# EAGLE board pc_max30003_brk (EAGLE 6.4)
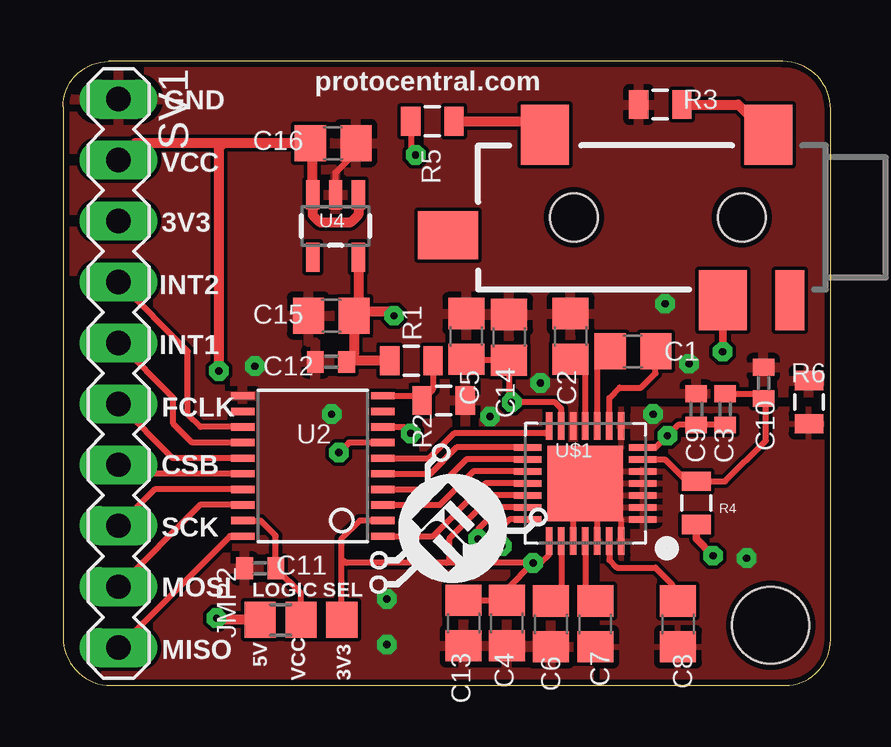
[diagram p0: board, top side]
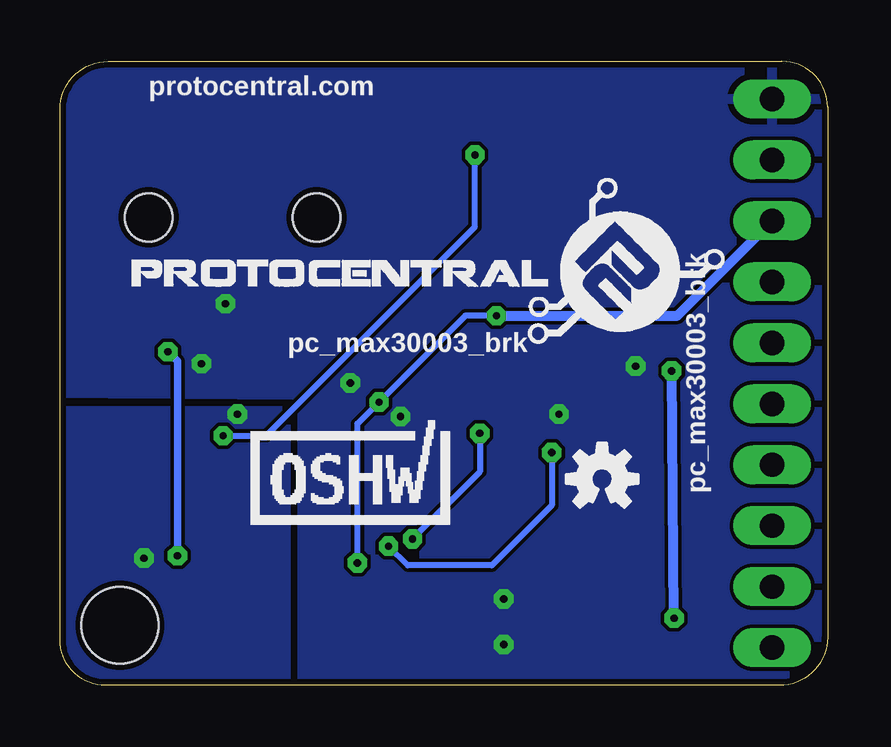
[diagram p1: board, bottom side, seen from below]

Size 32 x 26 mm. Coordinates in mm from the lower left corner, seen from the top.
Outline: 2,0 30.1,0 arc90 32,1.9 32,24 arc90 30,26 1.9,26 arc90 0,24.1 0,2 arc90 2,0
Copper layers (1*2*15*16): Top 0.035mm / dielectric 1.5mm / Route2 0.035mm / dielectric 0.15mm / Route15 0.035mm / dielectric 0.2mm / Bottom 0.035mm
Design rules "Circuitects-Rules": minimum track width 6mil, minimum drill 0.3mm, track to track 6mil, track to pad 6mil, pad to pad 6mil, via to via 6mil, smd to smd 6mil, copper to edge 10mil, drill to drill 8mil, minimum pad ring 12mil, minimum via ring 10mil, stop-mask expansion 4mil, vias tented up to drill 25mil, thermal gap 10mil
Holes 3.2 mm at 29.5,2.5

## Footprints (pad centres in the part's own frame; a part is rotated, then mirrored left to right if it is on the bottom)
C0805 = smd 1.3 x 1.5: 1 -0.95,0; 2 0.95,0
C0402 = smd 0.7 x 0.9: 1 -0.65,0; 2 0.65,0
A0R-JMP = smd 1.5 x 1.3: 1 0,1.7; 2 0,0; 3 0,-1.7
AUDIO-JACK-3.5MM-SMD = smd 2 x 2.5: RING 4.3,3.45; SLEEVE 2.4,-3.45; TIP 11.7,-3.45 | smd 1.2 x 2.5: RSH 1.5,3.45 | smd 2.5 x 2: TSH 15.75,0.75 | hole 2: 3.5,0; 10.5,0
0805 = smd 0.8 x 1.2: 1 -0.9,0; 2 0.9,0
MA10-1 = drill 1.016 long: 1 -11.43,0; 2 -8.89,0; 3 -6.35,0; 4 -3.81,0; 5 -1.27,0; 6 1.27,0; 7 3.81,0; 8 6.35,0; 9 8.89,0; 10 11.43,0
TSSOP20 = smd 0.305 x 0.991: 1 -2.925,-2.918; 2 -2.275,-2.918; 3 -1.625,-2.918; 4 -0.975,-2.918; 5 -0.325,-2.918; 6 0.325,-2.918; 7 0.975,-2.918; 8 1.625,-2.918; 9 2.275,-2.918; 10 2.925,-2.918; 11 2.925,2.918; 12 2.275,2.918; 13 1.625,2.918; 14 0.975,2.918; 15 0.325,2.918; 16 -0.325,2.918; 17 -0.975,2.918; 18 -1.625,2.918; 19 -2.275,2.918; 20 -2.925,2.918
SOT23-5 = smd 0.55 x 1.2: 1 -0.95,-1.3; 2 0,-1.3; 3 0.95,-1.3; 4 0.95,1.3; 5 -0.95,1.3
QFN-28 = smd 1.15 x 0.27: 1 -2.4,1.5; 2 -2.4,1; 3 -2.4,0.5; 4 -2.4,0; 5 -2.4,-0.5; 6 -2.4,-1; 7 -2.4,-1.5; 15 2.4,-1.5; 16 2.4,-1; 17 2.4,-0.5; 18 2.4,0; 19 2.4,0.5; 20 2.4,1; 21 2.4,1.5 | smd 0.27 x 1.15: 8 -1.5,-2.4; 9 -1,-2.4; 10 -0.5,-2.4; 11 0,-2.4; 12 0.5,-2.4; 13 1,-2.4; 14 1.5,-2.4; 22 1.5,2.4; 23 1,2.4; 24 0.5,2.4; 25 0,2.4; 26 -0.5,2.4; 27 -1,2.4; 28 -1.5,2.4 | smd 3.15 x 3.15: THERMAL 0,0

## Placement (x,y rotation side)
C1  1uF  [C0805]  23.76,13.91 180 top
C2  1nF  [C0805]  21.16,14.54 90 top
C3  1000pF  [C0402]  27.6,11.5 270 top
C4  10uF  [C0805]  18.5,2.6 270 top
C5  1uF  [C0805]  16.81,14.54 90 top
C6  10uF  [C0805]  20.34,2.56 270 top
C7  10uF  [C0805]  22.19,2.56 270 top
C8  1uF  [C0805]  25.64,2.56 270 top
C9  10pF  [C0402]  26.4,11.5 90 top
C10  10pF  [C0402]  29.2,12.6 90 top
C11  100n  [C0402]  8.22,4.88 0 top
C12  100n  [C0402]  11.17,13.48 0 top
C13  1uF  [C0805]  16.7,2.6 270 top
C14  10uF  [C0805]  18.6,14.5 90 top
C15  1u  [C0805]  11.18,15.4 0 top
C16  1u  [C0805]  11.26,22.59 180 top
JMP2  0R-JUMPA  [A0R-JMP]  9.92,2.73 90 top
JP3  [AUDIO-JACK-3.5MM-SMD]  31.8,19.5 180 top
R1  0R  [0805]  14.52,13.53 0 top
R2  10K  [0805]  15.87,11.87 180 top
R3  0R  [0805]  24.9,24.2 0 top
R4  49.9K  [0805]  26.4,7.6 90 top
R5  49.9K  [0805]  15.4,23.5 180 top
R6  0R  [0805]  31.1,11.8 270 top
SV1  [MA10-1]  2.31,13 270 top
U2  TXB0108PWR  [TSSOP20]  10.41,9.14 90 top
U4  AP2112K-3.3V  [SOT23-5]  11.36,19.14 180 top
U$1  MAX30003CTI+  [QFN-28]  21.77,8.41 180 top
U$2  PROTY_LOGO_WITH_TEXT  [PROTY_WITH_TEXT]  29,14.6 0 bottom
U$3  PROTY-LOGO  [LOGO-PROTY]  12.7,3.7 0 top
U$6  OSHW-LOGOS  [OSHW-LOGO-S]  9.4,8.6 0 bottom
U$7  [CERT-SMALL-SILK]  19.9,6.7 0 bottom

## Library data of the parts
C1-C16 = rcl
JMP2 = jump-0r-smd
JP3 = SparkFun-Connectors; PROD_ID: CONN-10353
R1-R6 U$6 = SparkFun
SV1 = con-lstb; OC_FARNELL: unknown; OC_NEWARK: unknown
U2 = adafruit
U4 = SparkFun-PowerIC; PROD_ID: VREG-12457
U$1-U$3 = circuitects
U$7 = OSHWA

## Nets
+3V3: C4.1 C5.1 C12.2 C13.1 C14.1 C15.2 JMP2.3 R1.1 SV1.3 U2.2 U4.5 U$1.13 U$1.19 U$1.22
AGND: C7.2 C8.2 R6.2 U$1.1 U$1.2 U$1.3 U$1.4 U$1.5 U$1.8 U$1.24 U$1.26 U$1.28 U$1.THERMAL
CSB: U2.5 U$1.15
CSB_OUT: SV1.7 U2.16
ECGN: C3.2 C9.1 R5.2 U$1.7
ECGP: C3.1 C10.1 R4.2 U$1.6
FCLK: U2.6 U$1.14
FCLK_OUT: SV1.6 U2.15
GND: C2.2 C4.2 C5.2 C6.2 C9.2 C10.2 C11.1 C12.1 C13.2 C14.2 C15.1 C16.1 R2.1 R3.1 R6.1 SV1.1 U2.11 U4.2 U$1.12
INT2B: U2.8 U$1.20
INT2B_OUT: SV1.4 U2.13
INTB: U2.7 U$1.21
INTB_OUT: SV1.5 U2.14
MISO: U2.1 U$1.18
MISO_OUT: SV1.10 U2.20
MOSI: U2.3 U$1.17
MOSI_OUT: SV1.9 U2.18
N$1: R1.2 R2.2 U2.10
N$2: C6.1 U$1.23
N$3: C1.1 U$1.9
N$4: JP3.SLEEVE R3.2
N$6: C1.2 U$1.10
N$7: C2.1 U$1.11
N$9: JP3.TIP R5.1
N$10: JP3.RING R4.1
N$13: C7.1 U$1.25
N$14: C8.1 U$1.27
SCLK: U2.4 U$1.16
SCLK_OUT: SV1.8 U2.17
VCC: C11.2 JMP2.2 U2.19
VDD: C16.2 JMP2.1 SV1.2 U4.1 U4.3

## Tracks (layer width: path | path; a pad name or v marks a point on that pad's centre or on a via)
+3V3  (via drill 0.3)
  Top 0.254: U$1.19 17.91,7.91 16.1,6.1 16.1,5.2 16,5.1 | U$1.13 20.77,11.53 20.5,11.8 v18.7,11.8 18.6,11.9 C14.1 16.85,13.55 C5.1 | U$1.22 20.27,5.47 19.9,5.1 v19.6,5.1 | v19.6,5.1 18.5,4 C4.1 C13.1 | U2.2 12.37,6.87 11.6,6.1 11.6,5.3 | 11.6,5.3 11.6,2.75 JMP2.3 | v19.6,5.1 16,5.1 | 16,5.1 11.8,5.1 11.6,5.3
  Top 0.406: R1.1 11.87,13.53 C12.2 12.13,13.79 C15.2 12.31,15.58 | 12.31,15.58 13.62,15.58 v13.8,15.4 | U4.5 12.31,15.58
  Bottom 0.254: v19.6,5.1 19.6,10.9 v18.7,11.8 15.1,15.4 v13.8,15.4
  Bottom 0.406: v13.8,15.4 6.26,15.4 SV1.3
AGND  (via drill 0.3)
  Top 0.254: U$1.24 21.27,7.91 U$1.THERMAL 22.27,7.91 | U$1.26 22.27,7.91 | U$1.28 23.27,6.91 22.27,7.91
  other vias: 28.5,5.3 24.6,11.3
  pour Bottom: 22.5,11.5 32.6,11.5 32.6,-0.1 22.5,-0.1
  pour Top: 22.5,11.5 32.6,11.5 32.6,-0.1 22.5,-0.1
CSB
  Top 0.254: U$1.15 16.41,9.91 15.31,8.81 U2.5
CSB_OUT
  Top 0.254: U2.16 2.69,8.81 SV1.7
ECGN  (via drill 0.3)
  Top 0.254: C3.2 C9.1 25.65,10.85 v25.2,10.4 24.71,9.91 U$1.7 | R5.2 14.5,22.3 v14.7,22.1
  Bottom 0.254: v25.2,10.4 23.4,10.4 14.7,19.1 v14.7,22.1
ECGP
  Top 0.254: U$1.6 25.09,9.41 26,8.5 R4.2 27.6,8.5 29.3,10.2 29.3,11.85 C10.1 29,12.15 C3.1
FCLK
  Top 0.254: U2.6 15.27,9.46 16.3,10.5 20.1,10.5 20.27,10.67 U$1.14
FCLK_OUT
  Top 0.254: U2.15 4.58,9.46 SV1.6
GND  (via drill 0.3)
  Top 0.254: U4.2 11.36,21.36 12.21,22.21 C16.1
  other vias: 8,13.3 13.5,1.7 13.5,3.6 11.2,11.3 25.1,15.9 26.1,13.4 19.9,12.6 17.8,11.2
  pour Top: 0,26.2 32.7,26.2 32.7,12.2 21.9,12.1 21.9,0 0,0.2
  pour Bottom: -0.1,26.2 32.7,26.2 32.7,12.2 21.9,12.1 21.9,0.1 -0.1,0.3
INT2B  (via drill 0.3)
  Top 0.254: U$1.20 18.21,7.41 17.3,6.5 v17.3,6.1 | U2.8 14.23,10.77 v14.5,10.5
  Bottom 0.254: v14.5,10.5 14.5,8.9 v17.3,6.1
INT2B_OUT
  Top 0.254: U2.13 5.74,10.77 5.2,11.3 5.2,13.92 SV1.4
INTB  (via drill 0.3)
  Top 0.254: U$1.21 18.61,6.91 18.3,6.6 v18.3,5.8 | U2.7 11.91,10.12 v11.5,9.7
  Bottom 0.254: v11.5,9.7 11.5,7.5 14,5 17.5,5 v18.3,5.8
INTB_OUT
  Top 0.254: U2.14 5.38,10.12 4.6,10.9 4.6,11.98 SV1.5
MISO
  Top 0.254: U$1.18 17.61,8.41 15.41,6.21 U2.1
MISO_OUT
  Top 0.254: U2.20 6.96,6.21 SV1.10
MOSI
  Top 0.254: U$1.17 17.11,8.91 15.71,7.51 U2.3
MOSI_OUT
  Top 0.254: U2.18 5.71,7.51 SV1.9
N$1
  Top 0.254: U2.10 14.78,12.06 R2.2 15.42,12.32 R1.2
N$2
  Top 0.254: U$1.23 20.77,3.94 C6.1
N$3
  Top 0.254: U$1.9 22.77,11.97 23.2,12.4 24.1,12.4 24.7,13 C1.1
N$4
  Top 0.406: R3.2 28.15,24.2 JP3.SLEEVE
N$6
  Top 0.254: U$1.10 22.27,13.37 C1.2
N$7
  Top 0.254: U$1.11 21.77,12.98 C2.1
N$9
  Top 0.406: R5.1 19.55,23.5 JP3.TIP
N$10  (via drill 0.3)
  Top 0.305: R4.1 26.4,6.1 v27.1,5.4 | JP3.RING v27.5,13.9
  Bottom 0.305: v27.1,5.4 27.1,13.5 v27.5,13.9
N$13
  Top 0.254: U$1.25 21.77,3.93 C7.1
N$14
  Top 0.254: U$1.27 22.77,5.23 23.1,4.9 24.7,4.9 25.4,4.2 25.4,3.75 C8.1
SCLK
  Top 0.254: U$1.16 16.81,9.41 15.56,8.16 U2.4
SCLK_OUT
  Top 0.254: U2.17 3.83,8.16 SV1.8
VCC
  Top 0.254: U2.19 8.23,6.87 8.87,6.23 C11.2 9.92,3.83 JMP2.2
VDD  (via drill 0.3)
  Top 0.406: U4.1 12.31,19.61 12,19.3 10.7,19.3 10.41,19.59 U4.3 10.41,22.49 C16.2 6.7,22.59 | JMP2.1 6.47,2.73 v6.4,2.8 | 6.7,22.59 3.01,22.59 SV1.2 | v6.5,13.1 6.5,22.39 6.7,22.59
  Bottom 0.406: v6.4,2.8 v6.5,13.1

## Text on the board
tPlace: protocentral.com | GND | VCC | 3V3 | INT2 | INT1 | FCLK | CSB | SCK | MOSI | LOGIC SEL | 5V | MISO | VCC | 3V3
bPlace: protocentral.com | pc_max30003_brk | pc_max30003_brk